# EAGLE board ATmega328P (EAGLE 9.5.2)
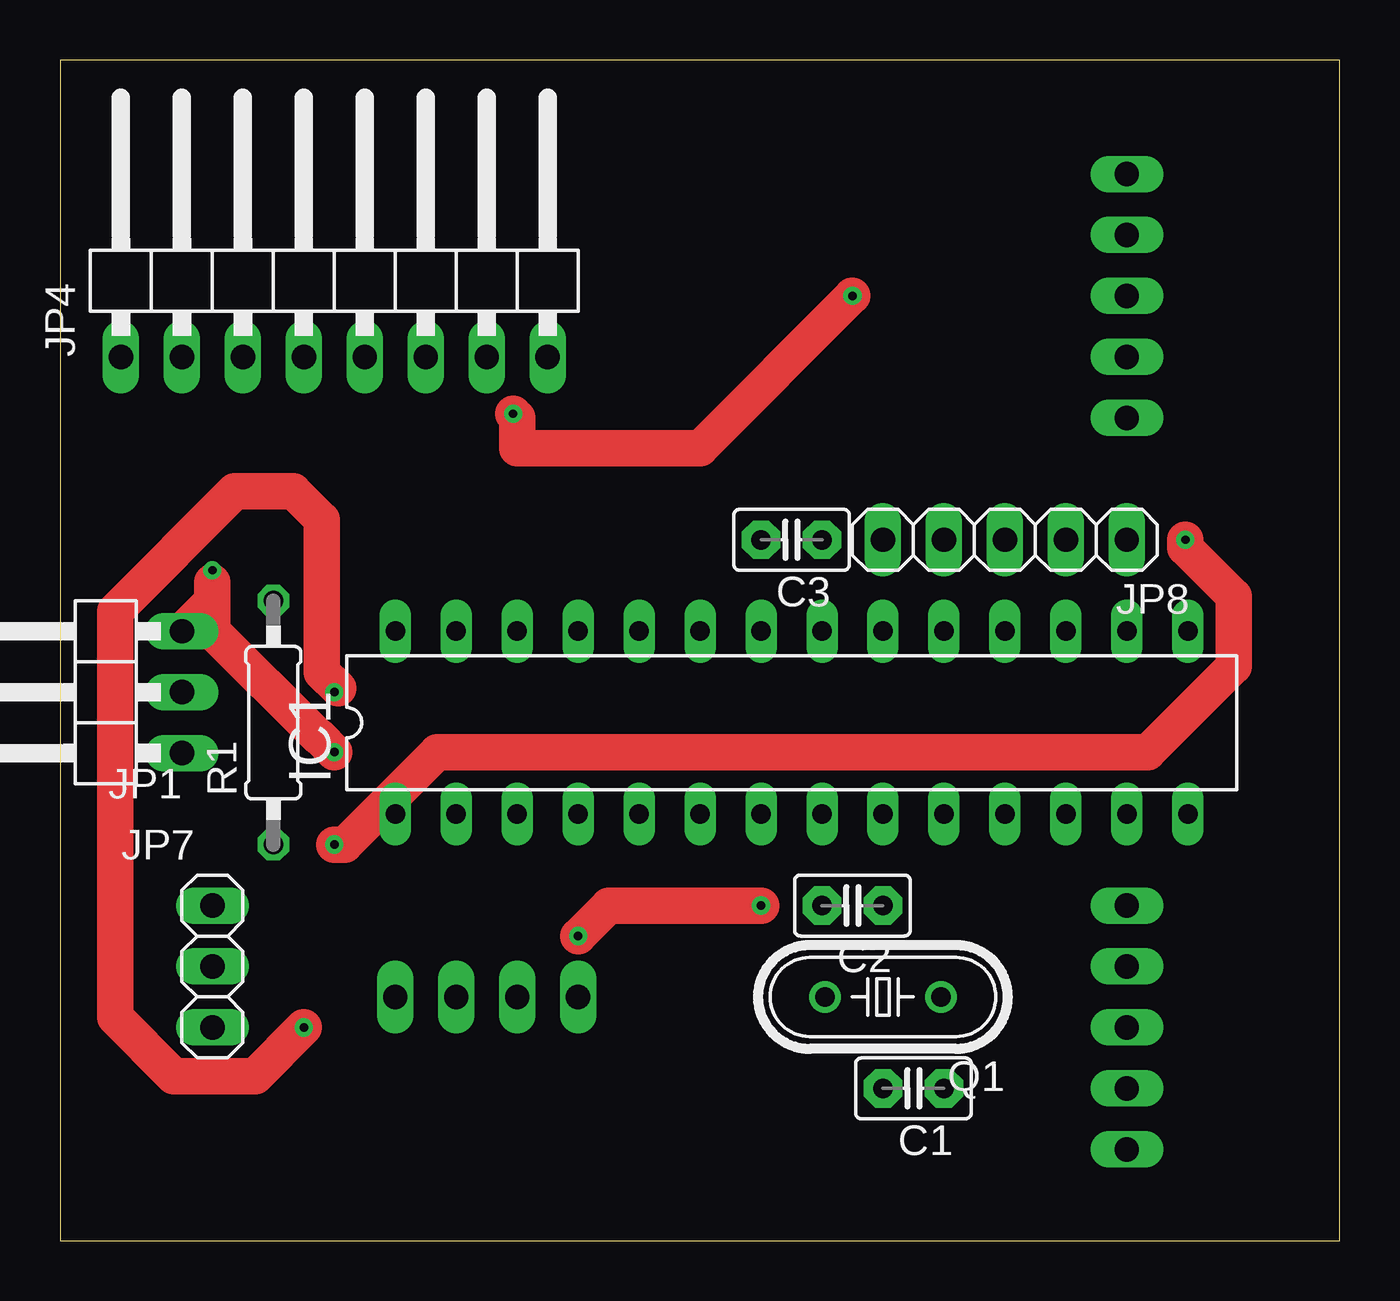
[diagram p0: board, top side]
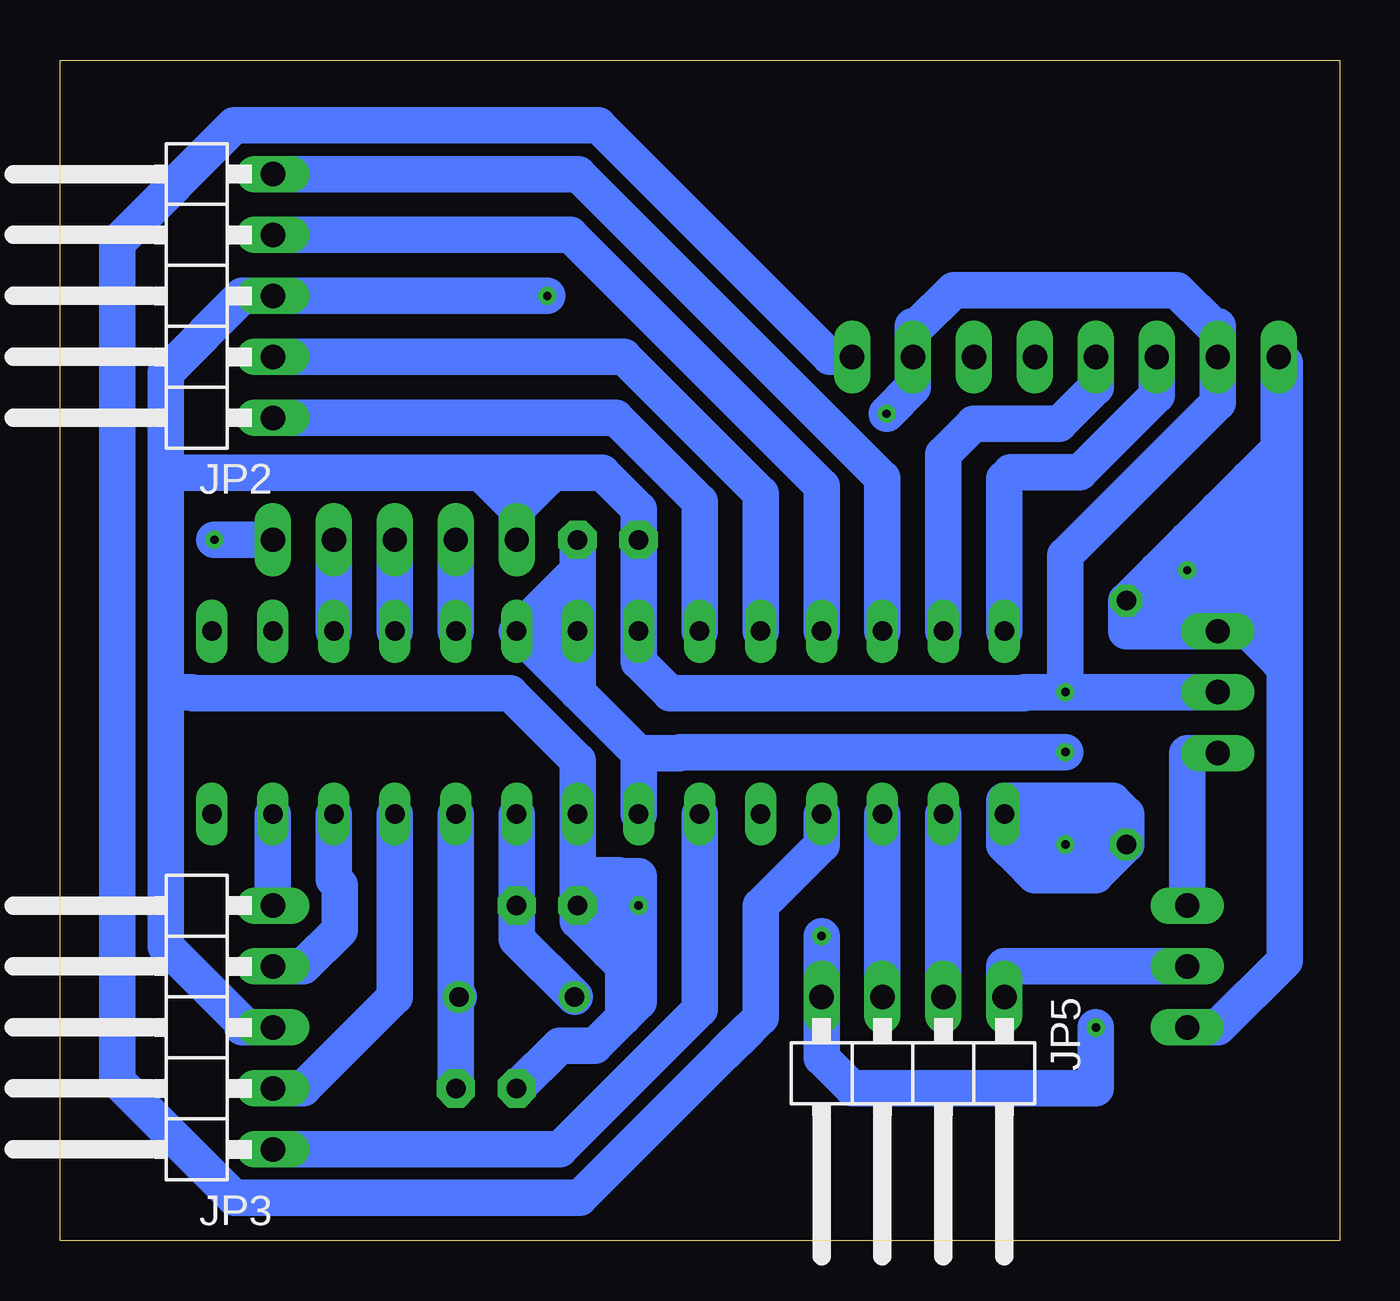
[diagram p1: board, bottom side, seen from below]

Size 53.32 x 49.2 mm. Coordinates in mm from the lower left corner, seen from the top.
Outline: 0,0 53.32,0 53.32,49.2 0,49.2 0,0
Copper layers (1*16): Top 0.035mm / dielectric 1.5mm / Bottom 0.035mm
Design rules "default *": minimum track width 6mil, minimum drill 0.35mm, track to track 0.5mm, track to pad 0.5mm, pad to pad 0.5mm, via to via 0.5mm, smd to smd 0.5mm, copper to edge 40mil, drill to drill 6mil, minimum pad ring 10mil, minimum via ring 8mil, stop-mask expansion 4mil, vias tented up to drill 0mil, thermal gap 10mil

## Footprints (pad centres in the part's own frame; a part is rotated, then mirrored left to right if it is on the bottom)
C2.5-2 = drill 0.813 pad 1.6 octagon: 1 -1.27,0; 2 1.27,0
DIL28-3 = drill 0.813 long: 1 -16.51,-3.81; 2 -13.97,-3.81; 3 -11.43,-3.81; 4 -8.89,-3.81; 5 -6.35,-3.81; 6 -3.81,-3.81; 7 -1.27,-3.81; 8 1.27,-3.81; 9 3.81,-3.81; 10 6.35,-3.81; 11 8.89,-3.81; 12 11.43,-3.81; 13 13.97,-3.81; 14 16.51,-3.81; 15 16.51,3.81; 16 13.97,3.81; 17 11.43,3.81; 18 8.89,3.81; 19 6.35,3.81; 20 3.81,3.81; 21 1.27,3.81; 22 -1.27,3.81; 23 -3.81,3.81; 24 -6.35,3.81; 25 -8.89,3.81; 26 -11.43,3.81; 27 -13.97,3.81; 28 -16.51,3.81
1X03/90 = drill 1.016 long: 1 -2.54,-3.81; 2 0,-3.81; 3 2.54,-3.81
1X05/90 = drill 1.016 long: 1 -5.08,-3.81; 2 -2.54,-3.81; 3 0,-3.81; 4 2.54,-3.81; 5 5.08,-3.81
1X08/90 = drill 1.016 long: 1 -8.89,-3.81; 2 -6.35,-3.81; 3 -3.81,-3.81; 4 -1.27,-3.81; 5 1.27,-3.81; 6 3.81,-3.81; 7 6.35,-3.81; 8 8.89,-3.81
1X04/90 = drill 1.016 long: 1 -3.81,-3.81; 2 -1.27,-3.81; 3 1.27,-3.81; 4 3.81,-3.81
1X03 = drill 1.016 long: 1 -2.54,0; 2 0,0; 3 2.54,0
1X05 = drill 1.016 long: 1 -5.08,0; 2 -2.54,0; 3 0,0; 4 2.54,0; 5 5.08,0
HC49/S = drill 0.813: 1 -2.413,0; 2 2.413,0
0207/10 = drill 0.813 octagon: 1 -5.08,0; 2 5.08,0

## Placement (x,y rotation side)
C1  22pF  [C2.5-2]  35.56,6.35 180 top
C2  22pF  [C2.5-2]  33.02,13.97 180 top
C3  [C2.5-2]  30.48,29.21 180 top
IC1  MEGA8-P  [DIL28-3]  30.48,21.59 0 top
JP1  [1X03/90]  1.27,22.86 90 top
JP2  [1X05/90]  48.26,39.37 90 bottom
JP3  [1X05/90]  48.26,8.89 90 bottom
JP4  [1X08/90]  11.43,40.64 0 top
JP5  [1X04/90]  17.78,6.35 180 bottom
JP7  [1X03]  6.35,11.43 270 top
JP8  [1X05]  39.37,29.21 180 top
Q1  16MHz  [HC49/S]  34.29,10.16 180 top
R1  10k  [0207/10]  8.89,21.59 90 top

## Library data of the parts
C1-C3 = capacitor-wima
IC1 = atmel; OC_FARNELL: unknown; OC_NEWARK: unknown
JP1-JP5 JP7 JP8 = pinhead
Q1 = crystal; OC_FARNELL: 1667008; OC_NEWARK: unknown
R1 = rcl; SPICEPREFIX: R

## Nets
3V3: JP1.1 JP7.1
5V: C3.1 IC1.7 IC1.20 IC1.21 JP1.3 JP4.1 JP7.3 R1.2
A1: IC1.23 JP2.1
A2: IC1.24 JP2.2
B1: IC1.25 JP2.4
B2: IC1.26 JP2.5
C1: IC1.6 JP3.1
C2: IC1.11 JP3.2
D1: IC1.12 JP3.4
D2: IC1.13 JP3.5
GND: C1.2 C2.2 C3.2 IC1.8 IC1.22 JP1.2 JP2.3 JP3.3 JP4.2 JP4.7 JP5.4 JP8.5
INT: IC1.4 JP4.8
N$1: C2.1 IC1.9 Q1.2
N$2: C1.1 IC1.10 Q1.1
N$3: JP5.1 JP7.2
N$5: IC1.19 JP8.4
N$6: IC1.18 JP8.3
N$7: IC1.17 JP8.2
N$9: IC1.1 JP8.1 R1.1
RX: IC1.2 JP5.2
SCL: IC1.28 JP4.3
SDA: IC1.27 JP4.4
TX: IC1.3 JP5.3
XCL: JP4.6
XDA: JP4.5

## Tracks (layer width: path | path; a pad name or v marks a point on that pad's centre or on a via)
3V3
  Bottom 1.524: JP1.1 6.35,20.32 JP7.1
5V  (via drill 0.35)
  Top 1.524: 6.35,25.4 JP1.3 6.35,26.67 | 6.35,26.67 6.35,27.43 | v11.43,20.36 10.8,21 10.75,21 6.35,25.4 | 6.35,25.4 6.35,26.67
  Bottom 1.524: IC1.20 IC1.21 | C3.1 31.75,27.94 | 31.75,27.94 IC1.21 | IC1.21 31.75,22.86 | 31.75,22.86 29.21,20.32 | IC1.7 29.21,20.32 | JP1.3 6.35,25.4 | 6.35,25.4 7.62,25.4 | 7.62,25.4 8.89,25.4 R1.2 7.62,27.94 | JP7.3 5.08,8.89 2.29,11.68 2.29,23.88 | JP1.3 3.81,25.4 | 3.81,25.4 2.54,24.13 | 2.54,24.13 2.29,23.88 | 29.21,20.32 27.51,20.32 27.47,20.36 v11.43,20.36 | IC1.20 31.75,27.94 | 31.75,22.86 IC1.20 | 7.62,27.94 6.35,29.21 | 5.08,30.48 6.35,29.21 | 5.08,30.48 3.81,31.75 | 3.81,31.75 2.54,33.02 | 2.54,33.02 JP4.1 2.29,36.58 2.29,23.88 | JP1.3 5.08,30.48 | 7.62,27.94 7.62,25.4 | 2.54,33.02 2.54,24.13 | 3.81,31.75 3.81,25.4 | 6.35,29.21 v6.35,27.94 6.35,25.4
A1
  Bottom 1.524: JP2.1 30.16,34.29 26.67,30.8 IC1.23
A2
  Bottom 1.524: JP2.2 29.84,36.83 24.13,31.12 IC1.24
B1
  Bottom 1.524: JP2.4 32.05,41.91 21.59,31.45 IC1.25
B2
  Bottom 1.524: JP2.5 31.73,44.45 19.05,31.77 IC1.26
C1
  Bottom 1.524: JP3.1 32.5,3.81 26.67,9.64 IC1.6
C2
  Bottom 1.524: JP3.2 43.18,6.35 39.37,10.16 IC1.11
D1
  Bottom 1.524: JP3.4 43.18,11.43 41.66,12.95 41.66,14.81 41.91,15.05 IC1.12
D2
  Bottom 1.524: IC1.13 JP3.5
GND  (via drill 0.35)
  Top 1.524: 11.59,23.02 10.91,23.7 10.91,30.05 9.73,31.23 7.29,31.23 2.29,26.24 2.29,9.32 4.75,6.87 8.14,6.87 v10.16,8.89 | v21.59,12.7 22.86,13.97 v29.21,13.97 | v18.88,34.46 19.05,34.29 19.05,33.02 26.67,33.02 v33.02,39.37
  Bottom 1.524: 31.75,15.24 IC1.8 31.75,20 34.57,22.82 47.79,22.82 47.83,22.86 48.91,22.86 | 31.75,15.24 C2.2 | C1.2 32.5,8.14 31.04,8.14 29.85,9.32 | JP3.3 45.72,8.89 45.72,9.08 48.91,12.27 48.91,22.86 | 48.91,22.86 48.91,31.75 | v11.43,22.86 13.13,22.86 13.17,22.82 27.9,22.82 29.21,24.13 IC1.22 C3.2 29.21,30.48 30.73,32 35.81,32 | v11.43,22.86 JP1.2 | 34.29,30.48 35.81,32 | 35.81,32 48.67,32 48.91,31.75 | JP8.5 34.29,30.48 | 34.29,30.48 34.29,31.75 | 34.29,30.48 33.02,31.75 | 48.91,31.75 48.91,36.18 45.72,39.37 JP2.3 v33.02,39.37 | v11.43,22.86 11.43,28.57 5.08,34.91 JP4.2 5.08,38.1 5.27,38.1 6.78,39.62 16.08,39.62 17.59,38.1 17.78,38.1 JP4.7 17.78,35.56 v18.88,34.46 | 29.85,9.32 29.85,11.43 30.48,12.06 | 30.48,12.06 31.75,13.33 C2.2 | v21.59,12.7 JP5.4 21.59,7.62 20.32,6.35 10.16,6.35 v10.16,8.89 | C2.2 30.48,13.97 | 30.48,13.97 v29.21,13.97 | 29.85,9.32 29.21,9.96 v29.21,13.97 | 30.48,13.97 30.48,12.06 | 31.75,15.24 30.05,15.24 30.01,15.2 29.21,15.2 v29.21,13.97
INT
  Bottom 1.524: IC1.4 21.59,16.51 24.13,13.97 24.13,9.32 24.65,8.8 25.62,7.83 31.66,1.79 46.05,1.79 50.94,6.67 50.94,41.59 46.05,46.47 30.89,46.47 21.25,36.83 JP4.8
N$1
  Bottom 1.524: IC1.9 C2.1 34.29,12.57 Q1.2
N$2
  Bottom 1.524: IC1.10 36.83,10.29 Q1.1 36.83,10.03 C1.1
N$3
  Bottom 1.524: JP7.2 13.97,11.43 JP5.1
N$5
  Bottom 1.524: JP8.4 IC1.19
N$6
  Bottom 1.524: JP8.3 IC1.18
N$7
  Bottom 1.524: JP8.2 IC1.17
N$9  (via drill 0.35)
  Top 1.524: v11.43,16.51 11.86,16.51 15.71,20.36 45.33,20.36 48.91,23.94 48.91,26.86 46.89,28.88 v46.89,29.21
  Bottom 1.524: IC1.1 11.43,17.78 | 8.89,17.78 10.16,17.78 | 10.16,17.78 11.43,17.78 | 8.89,17.78 R1.1 10.16,15.24 | IC1.1 13.97,16.51 13.34,15.88 | IC1.1 13.97,18.34 9.45,18.34 8.89,17.78 | 10.16,15.24 11.43,15.24 | 11.43,15.24 12.7,15.24 13.34,15.88 | 13.34,15.88 12.7,15.88 12.7,16.51 11.43,17.78 | 11.43,17.78 v11.43,16.51 11.43,15.24 | 10.16,17.78 10.16,15.24 | JP8.1 v46.89,29.21
RX
  Bottom 1.524: IC1.2 JP5.2
SCL
  Bottom 1.524: IC1.28 13.97,31.75 13.7,32.02 10.84,32.02 7.62,35.24 JP4.3
SDA
  Bottom 1.524: JP4.4 10.16,35.56 11.68,34.04 15.24,34.04 16.51,32.77 IC1.27
TX
  Bottom 1.524: IC1.3 JP5.3